# Altium PCB FSAE_BSPD_Simple.PcbDoc
Units mil, origin at the board's own origin, x right, y up, seen from the top; angles counter-clockwise.
Board outline 3805 x 2005 mil, 2 copper layers (Top Layer, Bottom Layer); 36 components, 21 nets, 86 pads, 16 vias.
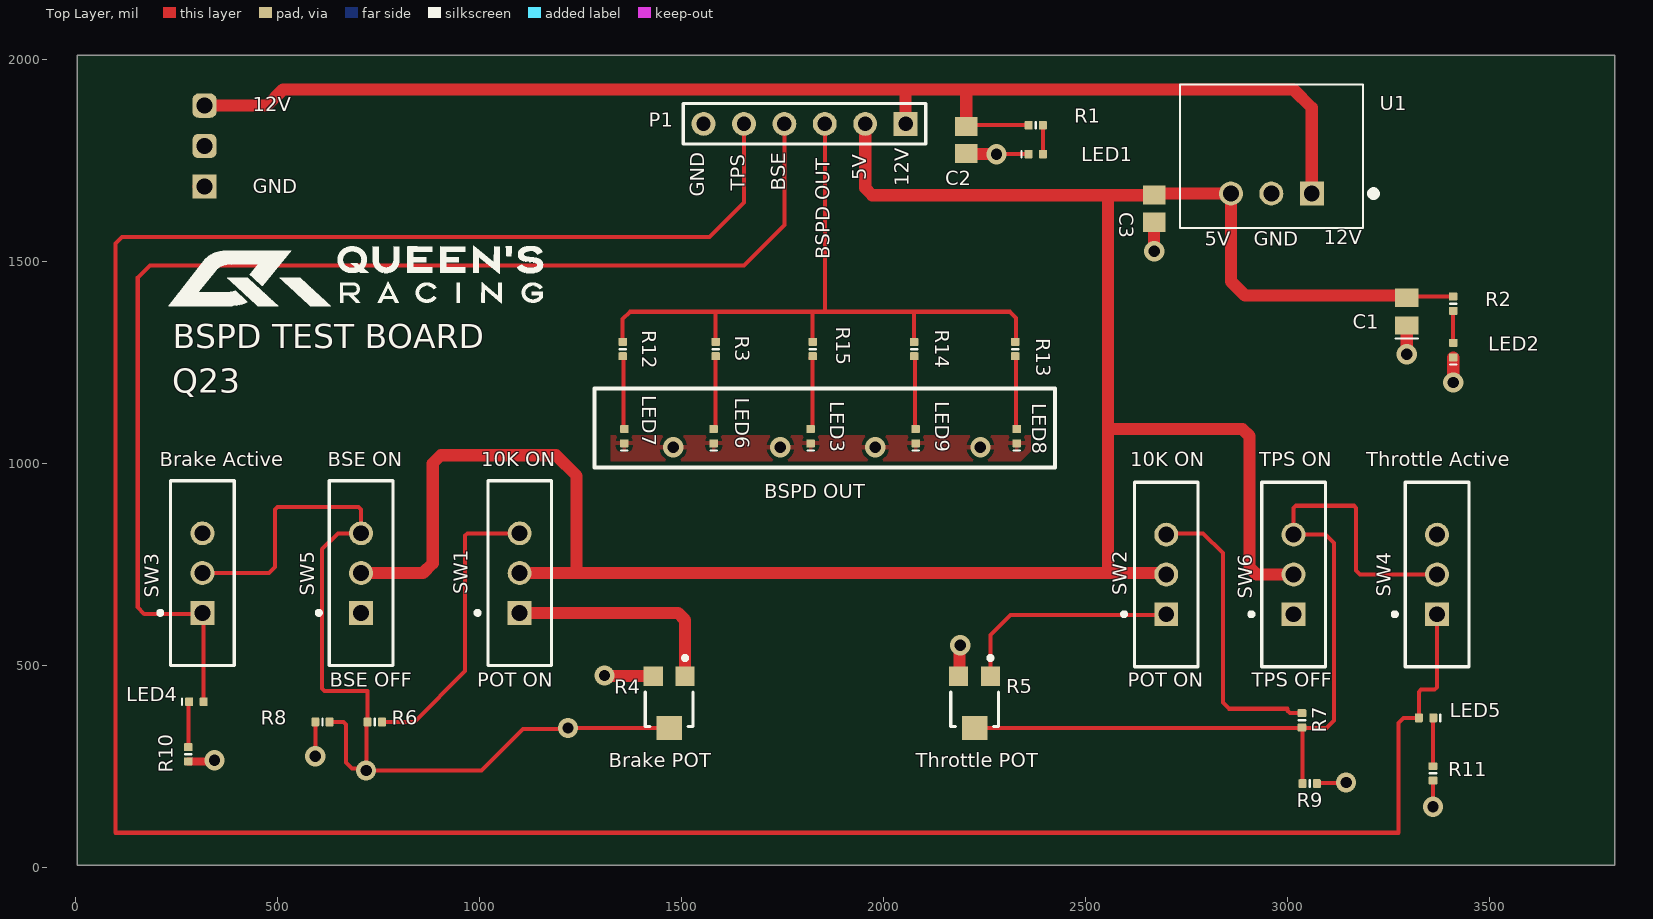
[diagram p0: Top Layer view]
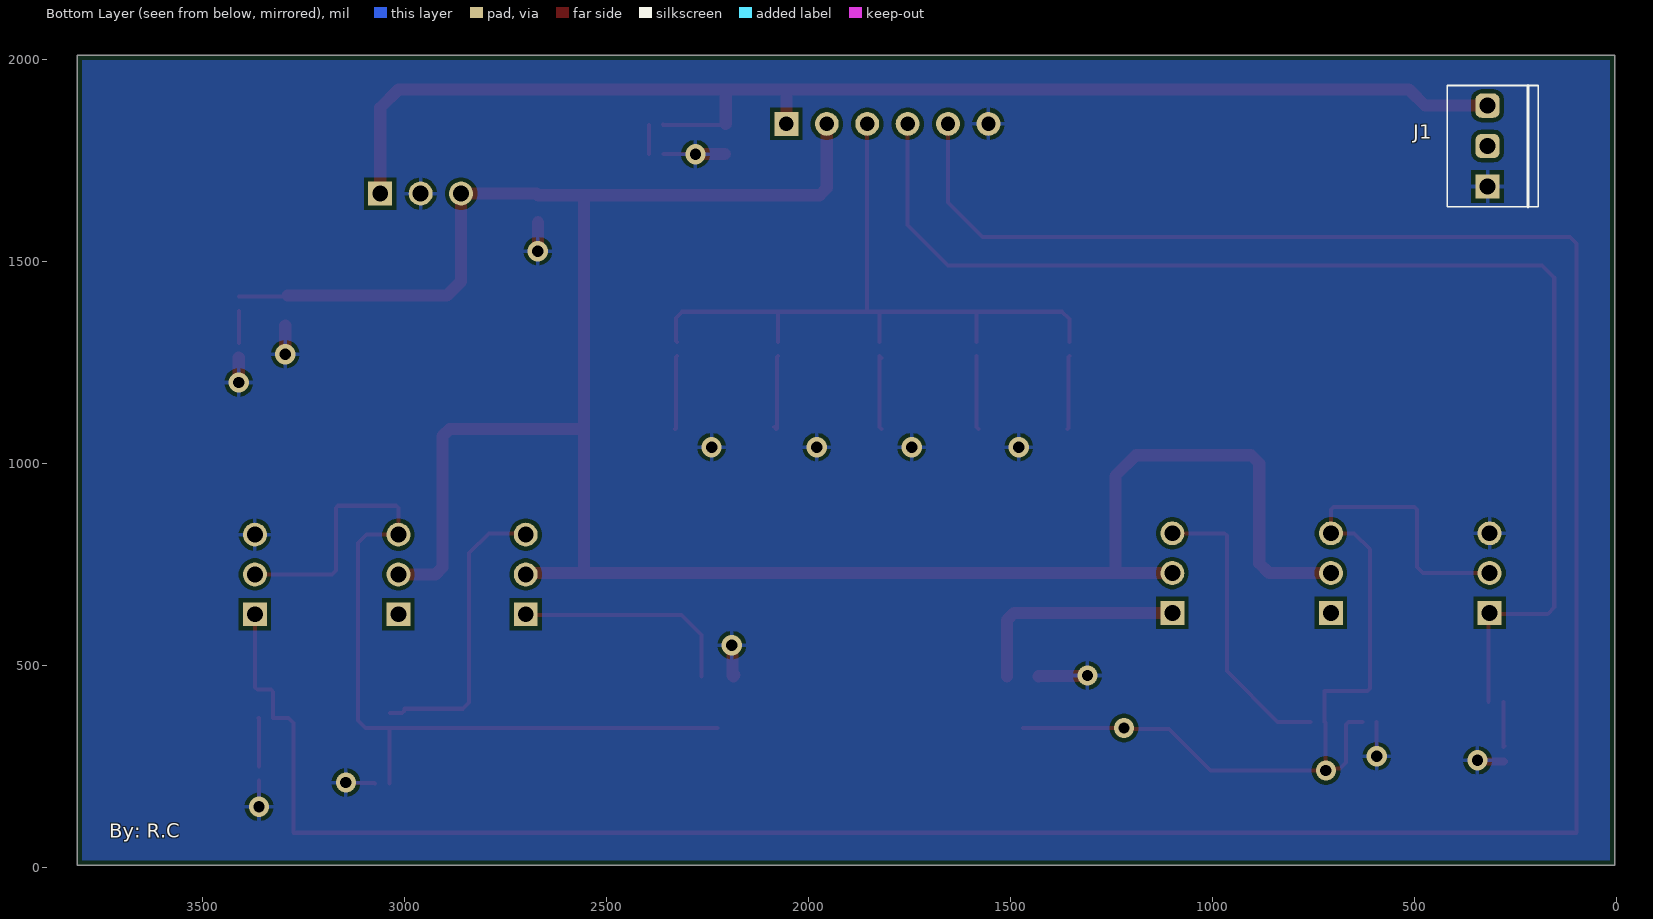
[diagram p1: Bottom Layer view, seen from below]
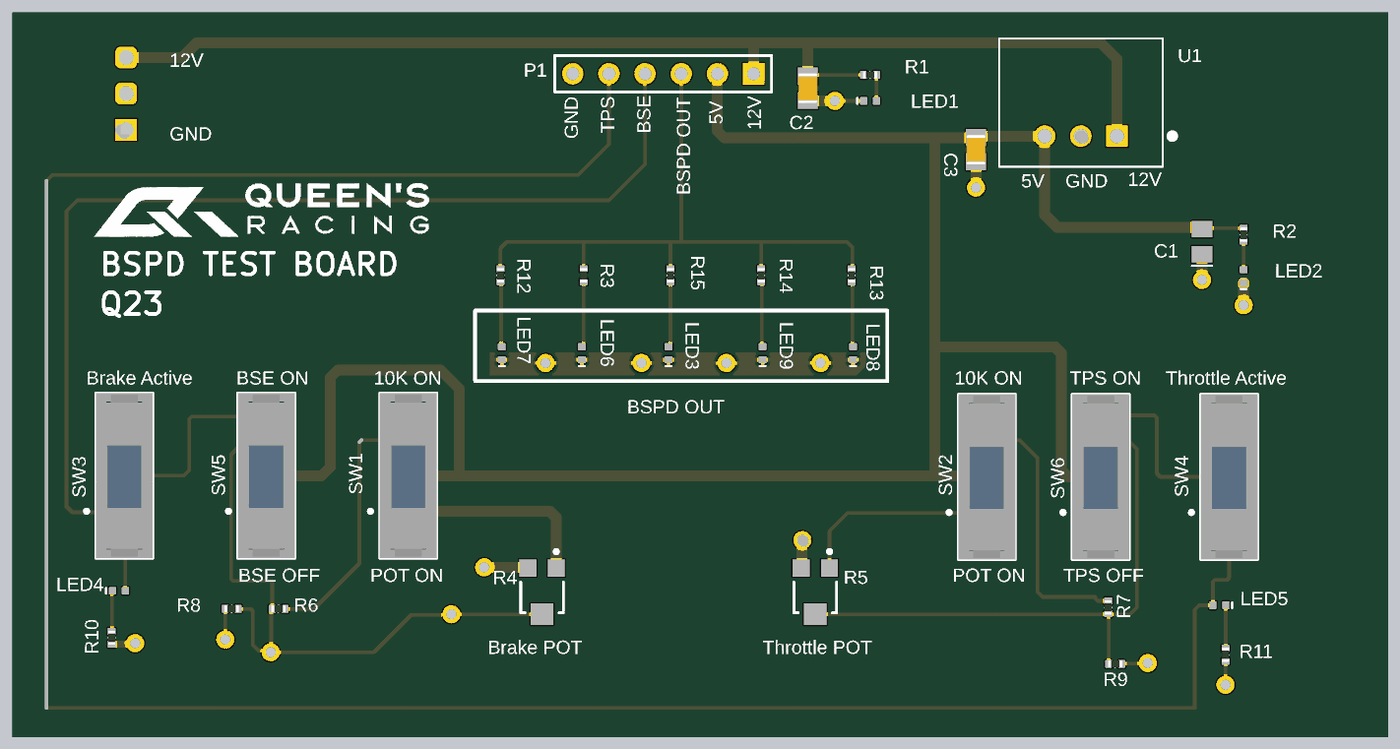
[diagram p2: 3D render of the assembled board from above, using the file's embedded part models]

## Layer stack, top to bottom
Top Solder: solder mask 0.4, Solder Resist, Dk 3.5
Top Layer: signal copper 1.4
Dielectric 1: dielectric 12.6, FR-4, Dk 4.8
Bottom Layer: signal copper 1.4
Bottom Solder: solder mask 0.4, Solder Resist, Dk 3.5

## Board outline
5,5 5,2010 3810,2010 3810,5

## Design rules (kind name [scope] priority, off if disabled: settings)
Clearance Clearance_1 [All] p1: gap=10 ignorepadtopadclearanceinfootprint=FALSE except(0: Arc-Hole Track-Hole SMDPad-Hole THPad-Hole Via-Hole Fill-Hole Poly-Hole Region-Hole Text-Hole)
Clearance [All] p2: gap=10 ignorepadtopadclearanceinfootprint=FALSE except(0: Arc-Hole Track-Hole SMDPad-Hole THPad-Hole Via-Hole Fill-Hole Poly-Hole Region-Hole Text-Hole)
PolygonConnect [All] p1: connectstyle=Relief reliefconductorwidth=10 reliefentries=4 polygonreliefangle="90 Angle" airgapwidth=10
RoutingVias [All] p1: holewidth=28 width=50 viastyle="Through Hole" minholewidth=28 minwidth=50 maxholewidth=28 maxwidth=50
SolderMaskExpansion [All] p1: expansion=4 istentingtop=FALSE
Width [All] p1: maxlimit=75 minlimit=10 preferedwidth=10 minimp=50.000000 maximp=50.000000 favimp=50.000000
30 further rules are at their usual default settings.

## Components (designator, comment, footprint, x,y, rotation, side; value= is the part's Value field where it differs from the comment)
C1 "22uF 16V" CAPC2012X14N 3295,1375.55 r90 top
C2 "Capacitor 10 uF +/- 10% 16 V 0805" CAPC2013X135X45NL10T25 2205,1800 r270 top value=10µF
C3 "Capacitor 10 uF +/- 10% 16 V 0805" CAPC2013X135X45NL10T25 2670,1630 r270 top value=10µF
J1 "HDR-3X1-VERT-2.54MM-1SIDE_SHROUD_1" HDR-1X3-2.54MM-1SIDE_SHROUD 320,1785 r270 bottom
LED1 "QBLP595-IG" QTB-QBLP595_V 2377.09,1765 r0 top
LED2 "QBLP595-IG" QTB-QBLP595_V 3410,1280 r90 top
LED3 "QBLP595-IG" QTB-QBLP595_V 1820,1067.09 r90 top
LED4 "QBLP595-IG" QTB-QBLP595_V 300,410 r0 top
LED5 "QBLP595-IG" QTB-QBLP595_V 3342.91,370 r180 top
LED6 "QBLP595-IG" QTB-QBLP595_V 1580,1067.09 r90 top
LED7 "QBLP595-IG" QTB-QBLP595_V 1358.87,1067.09 r90 top
LED8 "QBLP595-IG" QTB-QBLP595_V 2330,1067.09 r90 top
LED9 "QBLP595-IG" QTB-QBLP595_V 2080,1067.09 r90 top
P1 "Header 6" HDR1X6 2055,1840 r180 top
R1 "330R2J" RESC0402(1005)_L 2377.09,1836.73 r0 top value=330
R2 "330R2J" RESC0402(1005)_L 3410,1395 r270 top value=330
R3 "330R2J" RESC0402(1005)_L 1585,1282.72 r90 top value=330
R4 "35WR10KLFTR" BI-35WR10KLFTR-3_V 1470,410 r270 top
R5 "35WR10KLFTR" BI-35WR10KLFTR-3_V 2225.63,410 r270 top
R6 "10KR2F" RESC0402(1005)_L 741.49,360 r0 top value=10k
R7 "10KR2F" RESC0402(1005)_L 3035.58,364.17 r90 top value=10k
R8 "1D6KR2J" RESC0402(1005)_L 612.01,360 r0 top value=1.6k
R9 "1D6KR2J" RESC0402(1005)_L 3055,207.5 r180 top value=1.6k
R10 "330R2J" RESC0402(1005)_L 280,280 r270 top value=330
R11 "330R2J" RESC0402(1005)_L 3360,232.72 r90 top value=330
R12 "330R2J" RESC0402(1005)_L 1355,1282.72 r90 top value=330
R13 "330R2J" RESC0402(1005)_L 2326.13,1282.72 r90 top value=330
R14 "330R2J" RESC0402(1005)_L 2076.13,1282.72 r90 top value=330
R15 "330R2J" RESC0402(1005)_L 1825,1282.72 r90 top value=330
SW1 "EG1218" ESWI-EG1218_V 1100,728.43 r90 top
SW2 "EG1218" ESWI-EG1218_V 2700,725 r90 top
SW3 "EG1218" ESWI-EG1218_V 315,728.43 r90 top
SW4 "EG1218" ESWI-EG1218_V 3370,725 r90 top
SW5 "EG1218" ESWI-EG1218_V 707.5,728.43 r90 top
SW6 "EG1218" ESWI-EG1218_V 3015,725 r90 top
U1 "V7805-1000" CONV_V7805-1000 2960,1760 r180 top

## Footprints (in the part's own frame and the unit in brackets; to place one, negate y for a bottom-side part, rotate by r counter-clockwise, add the part's x,y. Pads: shape width x height; smd on the part's side, far side on the other; paste and mask are expansions set on the pad)
BI-35WR10KLFTR-3_V [mm] "SMD, 3-Leads, Body 3x3.1mm"
  rect 1.2x1.2 smd: 1(-1.6,1) 3(-1.6,-1)
  rect 1.5x1.6 smd: 2(1.65,0)
  silkscreen extent -2.87,-1.5 1.55,1.5, body extent -1.55,-1.5 1.55,1.5, height 1.8
CAPC2012X14N [mm] "Chip Capacitor, 2-Leads, Body 2.00x1.25mm, IPC Medium Density"
  rect 1.15x1.45 smd: 1(-0.875,0) 2(0.875,0)
  silkscreen extent -1.7,-0.71 -1.7,0.71, body extent -1.1,-0.72 1.1,0.72, height 1.35
CAPC2013X135X45NL10T25 [mm] "Chip Capacitor, 2-Leads, Body 2.10x1.35mm, IPC Medium Density"
  rect 1.2x1.4 smd: 1(-0.85,0) 2(0.85,0)
  body extent -1.05,-0.67 1.05,0.67, height 1.35
CONV_V7805-1000 [mm]
  rect 1.508x1.508 hole 1: 1(-2.54,2.35)
  round 1.508 hole 1: 2(0,2.35) 3(2.54,2.35)
  silkscreen extent -6.62,-4.5 5.75,4.5
ESWI-EG1218_V [mm] "THD, 3-Leads, Body 11.6x4mm, Pitch 2.5mm"
  rect 1.5x1.5 hole 1: 1(-2.5,0)
  round 1.5 hole 1: 2(0,0) 3(2.5,0)
  silkscreen extent -5.8,-2 5.8,2.77, body extent -5.8,-2 5.8,2, height 7.4
HDR1X6 [mm] "Connector; Header; 6 Position"
  rect 1.5x1.5 hole 0.9: 1(0,0)
  round 1.5 hole 0.9: 2(2.54,0) 3(5.08,0) 4(7.62,0) 5(10.16,0) 6(12.7,0)
  silkscreen extent -1.27,-1.27 13.97,1.27
HDR-1X3-2.54MM-1SIDE_SHROUD [mil]
  rect 60x60 hole 40: 1(100,0)
  rrect50% 60x60 hole 40: 2(0,0) 3(-100,0)
  silkscreen extent -150,-100 150,125, body extent -150,-103 150,128, height 395
QTB-QBLP595_V [mm] "SMD, 2-Leads, Body 1x0.5mm"
  rrect25% 0.5x0.55 smd: 1(-0.455,0) 2(0.455,0)
  silkscreen extent -0.9,-0.2 -0.9,0.2, body extent -0.5,-0.25 0.5,0.25, height 0.5
RESC0402(1005)_L [mm] "Chip Resistor, Body 1.0x0.5mm, IPC High Density"
  rrect25% 0.5x0.55 smd: 1(-0.45,0) 2(0.45,0)
  silkscreen extent 0,-0.2 0,0.2, body extent -0.5,-0.25 0.5,0.25, height 0.3

## Part data
C1: library part C-0805-CER-22UF-X5R-16V, "CAP CER 22UF 16V X5R 0805", Supplier Part Number 1=1276-6780-1-ND, Temperature Max=85, Temperature Min=-55, Voltage Max=35V, Mounting Technology="Surface Mount", Supplier 1=Digi-Key
C2 C3: library part CMP-001-00015-6, "Chip Capacitor, 10 uF, +/- 10%, 16 V, 0805 (2012 Metric)", Capacitor Type=Ceramic, Case/Package=0805, Max Operating Temperature=85°C, Min Operating Temperature=-55°C, Tolerance=10%, Voltage Rating=16V, Mounting Technology=SM, Pins=2, RoHS Compliant=True
J1: library part CMP-012-000045-1, "CONN HEADER VERT 3POS 2.54MM", Design Item ID=HDR-3X1-VERT-2.54MM-1SIDE_SHROUD_1, Mounting Technology="Surface Mount", Source=Other.SchLib
LED1 LED2 LED3 LED4 LED5 LED6 LED7 LED8 LED9: library part CMP-007-00041-3, "Chip LED 0402, Green, 0.02 A, 3.1 to 3.7 V, -40 to 80 degC, 2-Pin SMD, RoHS, Tape and Reel", Case/Package=0402, Colour=Green, Mounting Technology=SMT, Pins=2, RoHS Compliant=Yes
P1: "Header, 6-Pin", LatestRevisionDate=17-Jul-2002, LatestRevisionNote="Re-released for DXP Platform.", Publisher="Altium Limited"
R1 R2 R3 R10 R11 R12 R13 R14 R15: library part CMP-009-00095-2, "330R 0.063W 5% 0402 (1005 Metric)  SMD", Case/Package=0402, Power=63mW, Tolerance=5%, Mounting Technology=SMT, Pins=2
R4 R5: library part CMP-009-00041-2, "3 mm Single-Turn Open Frame Surface Mount Cermet Trimming Potentiometer, +/- 25%, 35 W, -40 to 125 degC, 3-Pin SMD, RoHS, Tape and Reel", Manufacturer="BI Technologies", Max Operating Temperature=125°C, Min Operating Temperature=-40°C, Package Description="3-Pin Surface Mount Device, Body 3 x 3.1 mm", Package Quantity=2000, Power=100mW, Resistance=10k, Tolerance=25%, Voltage Rating=50V, Case/Package=35WR10KLFTR, Composition=Potentiometer, Datasheet URL=http://www.bitechnologies.com/pdfs/35.pdf, Datasheet Version=Feb-10, Manufacturer URL=http://www.bi-technologies.net/, Mounting Technology=SM, Package Reference=35WR10KLFTR, Packaging=TapeandReel, RoHS Compliant=True
R6 R7: library part CMP-009-00066-2, "10K 0.063W 1% 0402 (1005 Metric)  SMD", Case/Package=0402, Power=63mW, Tolerance=1%, Mounting Technology=SMT, Pins=2
R8 R9: library part CMP-009-00073-2, "1K6 0.063W 5% 0402 (1005 Metric)  SMD", Case/Package=0402, Power=63mW, Tolerance=5%, Mounting Technology=SMT, Pins=2
SW1 SW2 SW3 SW4 SW5 SW6: library part CMP-011-00006-2, "Slide Switch, SPDT, 500 V, -20 to 70 degC, 3-Pin THD, RoHS, Bulk", Contact Current Rating=200mA, Manufacturer=E-Switch, Max Operating Temperature=70°C, Min Operating Temperature=-20°C, Operating Force=250gf, Package Description="3-Pin Through Hole Device, Body 11.6 x 4 mm, Pitch 2.5 mm", Package Quantity=1000, Voltage Rating (AC)=30V, Case/Package=EG1218, Contact Finish=Silver, Contact Material=Copper, Contact Plating=Silver, Current Rating=200mA, Datasheet URL=https://www.e-switch.com/system/asset/product_line/data_sheet/119/EG.pdf, Datasheet Version=Oct-15, Manufacturer URL=http://www.e-switch.ch/en/, Mounting Technology=TH, Package Reference=EG1218, Packaging=Bulk, Pins=3, RoHS Compliant=True, Throw Configuration=SPDT, Voltage Rating (DC)=30V
U1: "3.3 Vdc, 1 A, 1.65 W, 4.5~28 Vdc Input Range", Package=None, Availability=Unavailable, MF="{'manufacturer': u'CUI'}", MP=V7805-1000, Price=None

## Via types
v1: diameter 50, hole 28, Top Layer to Bottom Layer, 16 vias

## Nets (pads, with @x,y where several pads share a name; then routed paths per layer and width w, separated by ;. In a path a pad name is that pad's centre, name@x,y a point inside that pad or via, vN(x,y) a via of type N, cw(c..) or ccw(c..) an arc to the next point about the centre after c; other vN are vias at no path point)
5V: C1.2 C3.1 P1.2 R2.1 SW1.2 SW2.2 SW5.2 SW6.2 U1.3 | length 6250.3
  Top Layer w10: C3.1 C3.1@2674.02,1667.48 ; C1.2@3289.56,1415.43 3292.28,1412.72 R2.1
  Top Layer w30: SW5.2 860.73,728.43 885,752.7 885,1000 905,1020 1190,1020 1241.08,968.92 1241.08,728.43 ; SW1.2 1241.08,728.43 ; P1.2 1955,1681.04 1972.57,1663.46 2555.9,1663.46 ; C3.1 2555.9,1663.46 ; C3.1@2674.02,1667.48 U1.3 2860,1450 2894.57,1415.43 C1.2@3289.56,1415.43 ; SW2.2@2700,728.43 2555.9,728.43 ; SW6.2 2923.43,725 2905.86,742.57 2905.86,1067.43 2888.28,1085 2555.9,1085 ; 1241.08,728.43 2555.9,728.43 ; 2555.9,728.43 2555.9,1085 ; 2555.9,1085 2555.9,1663.46
12V: C2.1 J1.3 P1.1 R1.1 U1.1 | length 3314.9
  Top Layer w10: C2.1 2208.27,1836.73 R1.1 R1.1@2360.4,1837.76
  Top Layer w30: J1.3 474.42,1885 514.42,1925 2055,1925 ; P1.1 2055,1925 ; C2.1@2205,1840 2205,1925 ; U1.1 3060,1880 3015,1925 2205,1925 ; 2055,1925 2205,1925
BSE: LED4.2 P1.4 SW3.1 | length 3110.5
  Top Layer w10: LED4.2@317.75,410.16 LED4.2 317.91,627.09 SW3.1 312.25,627.25 171.04,627.25 154.14,644.14 155,645 155,1460 185,1490 1655,1490 1755,1590 P1.4
BSPD_OUT: P1.3 R3.2 R12.2 R13.2 R14.2 R15.2 | length 1793.3
  Top Layer w10: R12.2 1355,1357.28 1372.72,1375 1585,1375 ; R3.2 1585,1375 ; R15.2 1825,1375 ; P1.3 1855,1375.02 ; R14.2 2076.13,1373.06 2078.06,1375 ; R13.2 2328.06,1302.37 2328.06,1360 2313.06,1375 2078.06,1375 ; 1585,1375 1825,1375 ; 1825,1375 1854.98,1375 ; 1854.98,1375 2078.06,1375
GND: C1.1 C2.2 C3.2 J1.1 LED1.1 LED2.1 LED3.1 LED6.1 LED7.1 LED8.1 LED9.1 P1.6 R4.3 R5.3 R8.1 R9.1 R10.2 R11.1 SW3.3 SW4.3 U1.2 | length 882.6
  Top Layer w10: SW3.3 SW3.3@316.85,825 ; v1(594.29,275) R8.1 ; C2.2 C2.2@2206.54,1765 ; v1(2280,1765) LED1.1 ; R9.1 3073.97,208.75 3143.75,208.75 v1(3145,210) ; v1(3360,150) R11.1
  Top Layer w20: R10.2 280.16,262.44 342.44,262.44 v1(345,265)
  Top Layer w30: J1.1@305,1685 J1.1@315,1675 ; v1(1310,475) 1311,474 1429.63,474 R4.3 ; R5.3@2183.13,476.12 R5.3 2188.13,474.86 2188.13,548.13 v1(2190,550) v1@2193.13,546.87 ; C2.2@2206.54,1765 v1(2280,1765) ; v1(2670,1525) C3.2 ; U1.2 U1.2@2965.62,1661.86 ; v1(3295,1270) C1.1 ; v1(3410,1200) LED2.1
  other v1: 1480,1040 1745,1040 1980,1040 2240,1040
NetLED1_2: LED1.2 R1.2 | length 71.8
  Top Layer w10: R1.2 2394.9,1836.63 2394.9,1765.1 LED1.2
NetLED2_2: LED2.2 R2.2 | length 79.4
  Top Layer w10: LED2.2 R2.2
NetLED3_2: LED3.2 R15.1 | length 189.2
  Top Layer w10: LED3.2 1820.16,1085 1825,1089.84 R15.1 1824.84,1265 R15.1@1820,1260.16
NetLED4_1: LED4.1 R10.1 | length 114.9
  Top Layer w10: R10.1@277.72,300 R10.1 281.04,298.76 LED4.1@281.04,408.96
NetLED5_1: LED5.1 R11.2 | length 119.9
  Top Layer w10: R11.2 3360.41,250.85 3360.41,369.59 LED5.1
NetLED6_2: LED6.2 R3.1 | length 182.2
  Top Layer w10: LED6.2 1580.16,1085 1585,1089.84 R3.1
NetLED7_2: LED7.2 R12.1 | length 181.6
  Top Layer w10: R12.1 1356.94,1263.06 1356.94,1086.94 LED7.2
NetLED8_2: LED8.2 R13.1 | length 181.8
  Top Layer w10: R13.1 2328.06,1263.06 2328.06,1086.94 LED8.2 LED8.2@2330.16,1085
NetLED9_2: LED9.2 R14.1 | length 188.6
  Top Layer w10: R14.1 2078.06,1263.06 2078.06,1086.94 LED9.2 2080.16,1085 LED9.2@2085,1089.84
NetR4_1: R4.1 SW1.1 | length 556.1
  Top Layer w30: SW1.1 1491.8,630 1509.37,612.43 R4.1
NetR4_2: R4.2 R6.1 R8.2 SW3.2 SW5.3 | length 2363.2
  Top Layer w10: SW3.2 479.74,728.43 495,743.68 495,886.08 500.86,891.94 701.64,891.94 707.5,886.08 SW5.3 650.21,826.85 610.73,787.38 610.73,442.6 616.59,436.75 723.77,436.75 R6.1 ; R8.2@630.1,360 664.14,360 670,354.14 670,259.61 685,244.61 715.39,244.61 v1(720,240) ; R6.1@721.14,358.86 721.14,241.14 v1(720,240) ; R4.2 v1(1219.61,345.04) 1217.58,343.01 1108.01,343.01 1005,240 v1(720,240)
NetR5_1: R5.1 SW2.1 | length 566.9
  Top Layer w10: R5.1 2265,575 2315,625 2695,625 2700,630 SW2.1@2695,635
NetR5_2: R5.2 R7.1 R9.2 SW4.2 SW6.3 | length 2166.7
  Top Layer w10: R5.2 R7.1@3035.58,345.04 ; R9.2 3037.28,343.34 R7.1@3035.58,345.04 ; SW4.2 3179.74,725 3170,734.74 3170,889.14 3164.14,895 3020.86,895 3015,889.14 SW6.3 3094.12,823.43 3115,802.55 3115,364 3096.04,345.04 R7.1@3035.58,345.04
NetR6_2: R6.2 SW1.3 | length 732
  Top Layer w10: R6.2@757.72,360 839.17,360 965,485.83 965,820.99 970.86,826.85 SW1.3
NetR7_2: R7.2 SW2.3 | length 739.4
  Top Layer w10: SW2.3@2700,826.85 2790.73,826.85 2840,777.58 2840,407.74 2855.02,392.72 3000,392.72 3000,387.75 3005.86,381.89 R7.2
TPS: LED5.2 P1.5 SW4.1 | length 7046.7
  Top Layer w10: P1.5 1655,1645 1570,1560 115.86,1560 100,1544.14 100,85.86 3275,85.86 3275,357.68 3287.32,370 LED5.2 3325,434.14 3330.86,440 3364.14,440 3370,445.86 SW4.1
pads on no net: J1.2 SW5.1 SW6.1

## Polygon pours and split planes (outlines as drawn)
GND on Top Layer "GND_L01_P002" (solid, pour order 2): 1325,1070 2365,1070 2365,1030 2340,1005 1325,1005
GND on Bottom Layer "GND_L02_P001" (solid, remove dead copper, pour order 1): 17.5,1997.5 17.5,17.5 3797.5,17.5 3797.5,1997.5

## Silkscreen, mask and mechanical layers (free items; w line width, h text height)
Top Overlay:
  drawing of 20 lines, arcs and shapes, not listed
  text "12V" at 440,1859.39 h60
  text "5V" at 1969.38,1700 h60 r90
  text "12V" at 2075,1685 h60 r90
  text "TPS" at 1669.63,1675 h60 r90
  text "BSE" at 1769.63,1675 h60 r90
  text "GND" at 1569.38,1660 h60 r90
  text "GND" at 440,1655.62 h60
  text "12V" at 3089.68,1530 h60
  text "5V" at 2795,1525.62 h60
  text "GND" at 2917.07,1525.62 h60
  text "BSPD OUT" at 1879.38,1505 h60 r90
  text "BSPD TEST BOARD" at 241.52,1285 h60
  text "Q23" at 240,1175 h60
  text "Brake Active" at 210,980.62 h60
  text "BSE ON" at 624.82,980.62 h60
  text "10K ON" at 1005,980.62 h60
  text "10K ON" at 2610.79,980.62 h60
  text "TPS ON" at 2929.53,980.62 h60
  text "Throttle Active" at 3194.53,980.62 h60
  text "BSPD OUT" at 1705,900.62 h60
  text "BSE OFF" at 630.1,434.73 h60
  text "POT ON" at 995,434.73 h60
  text "POT ON" at 2604.74,434.73 h60
  text "TPS OFF" at 2911.3,434.73 h60
  text "Brake POT" at 1320,235.62 h60
  text "Throttle POT" at 2080,235.62 h60
Bottom Overlay:
  text "By: R.C" at 3730,61.27 h60